# Altium PCB Expander.PcbDoc
Units mil, origin at the board's own origin, x right, y up, seen from the top; angles counter-clockwise.
Board outline 4050.03 x 1530.03 mil, 2 copper layers (Top Layer, Bottom Layer), stack 61.756 mil thick; 10 components, 42 nets, 147 pads, 15 vias.
Unrouted connection lines stored in the file: 1.
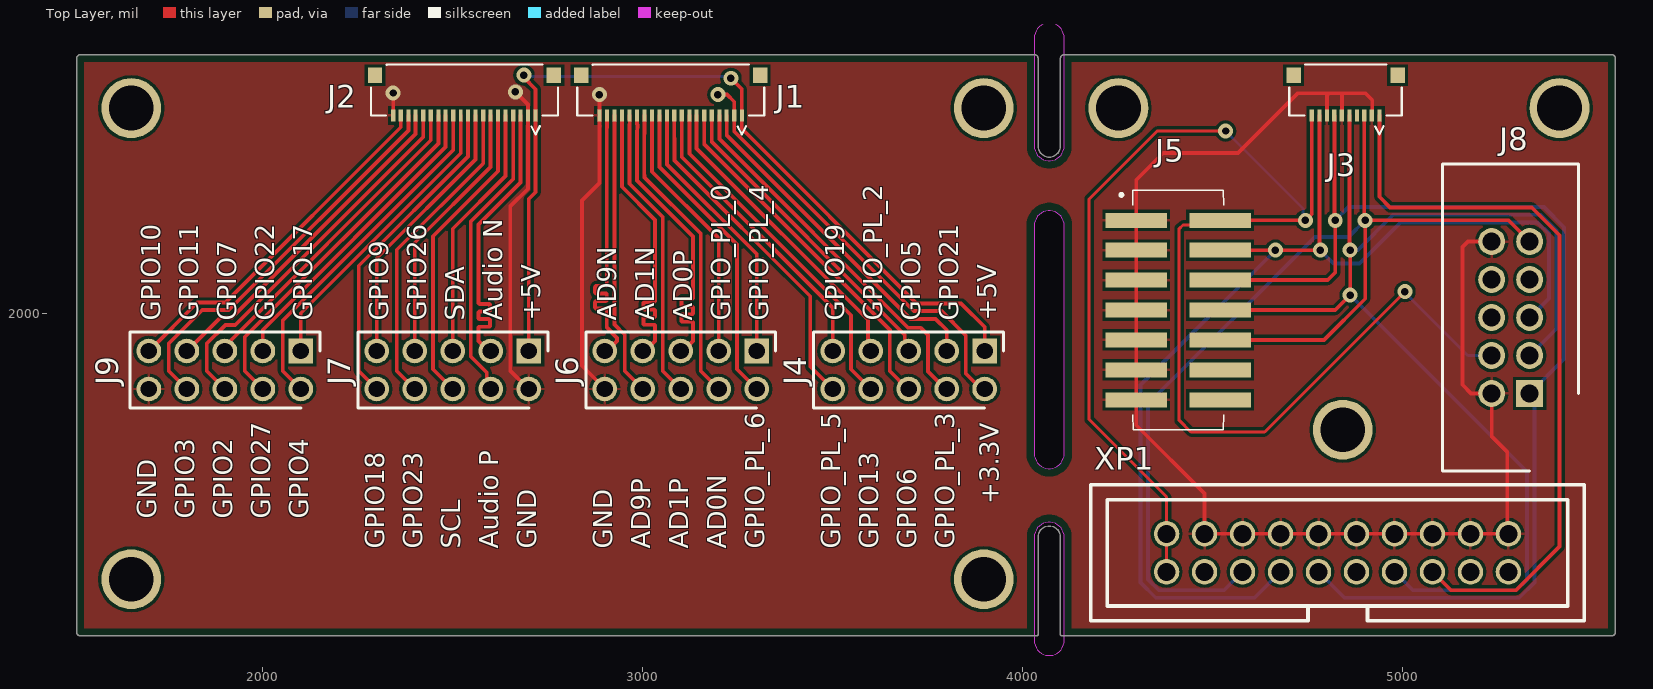
[diagram p0: Top Layer view]
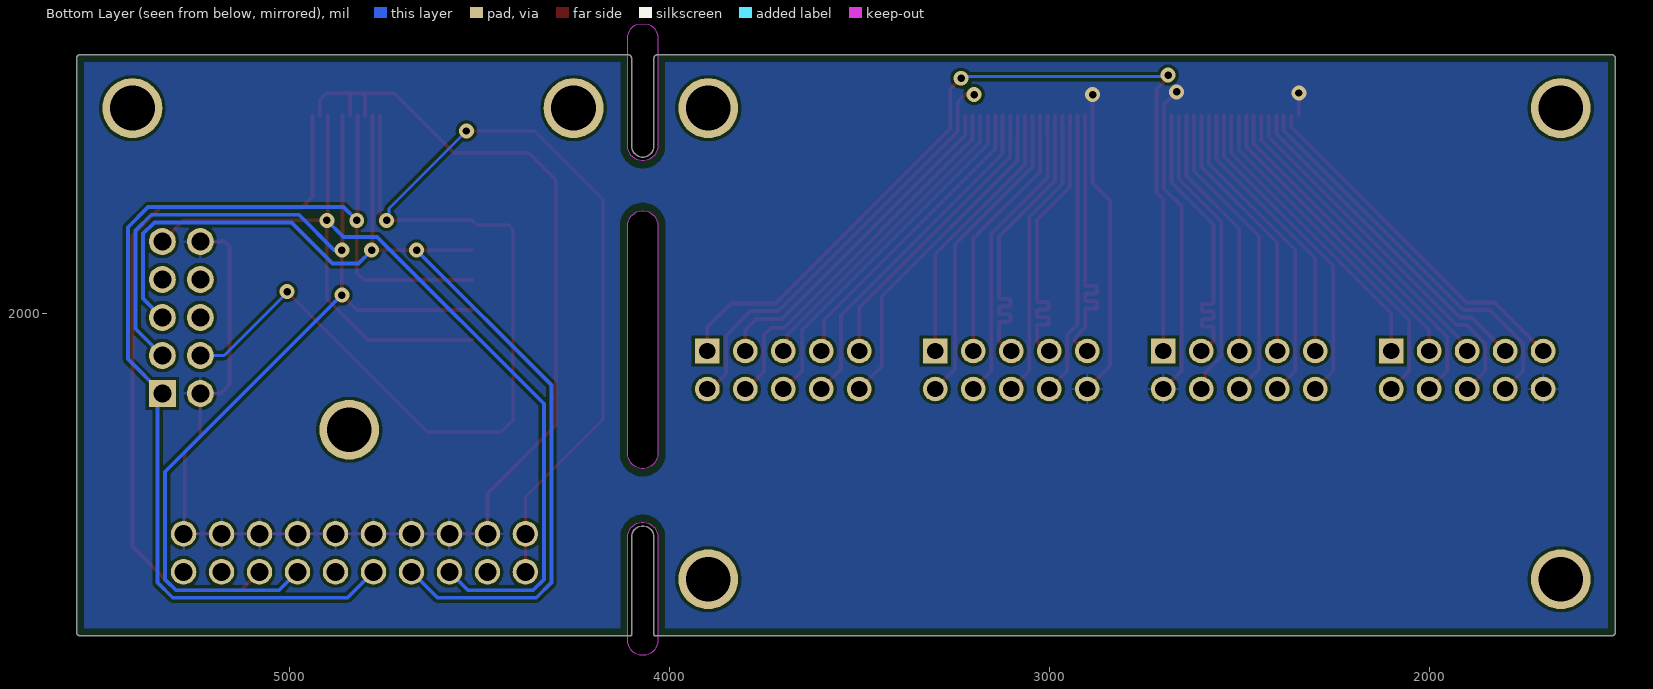
[diagram p1: Bottom Layer view, seen from below]

## Layer stack, top to bottom
Top Solder: solder mask 1, SM-001, Dk 4
Top Layer: signal copper 1.378
Dielectric 1: core 59, Core-043, Dk 4.3
Bottom Layer: signal copper 1.378
Bottom Solder: solder mask 1, SM-001, Dk 4

## Board outline
1520,1149.98 1540,1149.98 4036.07,1149.98 ccw(c4036.07,1155) 4041.08,1155 ccw(c4036.07,1155) 4040.63,1157.08 4040.63,1413.87 4042.63,1421.34 4046.5,1428.03 4051.97,1433.5 4058.66,1437.37 4066.13,1439.37 4073.87,1439.37 4081.34,1437.37 4088.03,1433.5 4093.5,1428.03 4097.37,1421.34 4099.37,1413.87 4099.37,1157.08 ccw(c4103.93,1155) 4103.93,1149.98 4104.38,1149.98 5550,1149.98 ccw(c5550,1160) 5560.02,1160 5560.02,2670 ccw(c5550,2670) 5550,2680.02 4109.39,2680.02 ccw(c4109.39,2670) 4099.37,2670 4099.37,2436.13 4097.37,2428.66 4093.5,2421.97 4088.03,2416.5 4081.34,2412.63 4073.87,2410.63 4066.13,2410.63 4058.66,2412.63 4051.97,2416.5 4046.5,2421.97 4042.63,2428.66 4040.63,2436.13 4040.63,2670 ccw(c4030.61,2670) 4030.61,2680.02 1520,2680.02 ccw(c1520,2670) 1509.98,2670 1509.98,1160 ccw(c1520,1160)
cut-out: 4030.61,1138 ccw(c4070,1138) 4109.39,1138 4109.39,1410 ccw(c4070,1410) 4030.61,1410
cut-out: 4030.61,2440 ccw(c4070,2440) 4109.39,2440 4109.39,2724 ccw(c4070,2724) 4030.61,2724
cut-out: 4030.61,1630 ccw(c4070,1630) 4109.39,1630 4109.39,2230 ccw(c4070,2230) 4030.61,2230

## Design rules (kind name [scope] priority, off if disabled: settings)
BoardOutlineClearance [All] p1: gap=20 ignorepadtopadclearanceinfootprint=FALSE
Clearance Clearance_not_via [not IsVia vs not IsVia] p1: gap=7.95 ignorepadtopadclearanceinfootprint=FALSE
Clearance Clearance_via [IsVia] p2: gap=7.95 ignorepadtopadclearanceinfootprint=FALSE
Clearance Clearance_same_net [All] p3: gap=7.95 ignorepadtopadclearanceinfootprint=TRUE
Clearance Clearance_pad_pad [IsPad vs IsPad] p4: gap=7.95 ignorepadtopadclearanceinfootprint=FALSE
ComponentClearance [All] p1: gap=3.94 collisioncheckmode=3 verticalgap=10 showdistances=FALSE
DiffPairsRouting [All] p1: maxlimit=10 minlimit=4 mostfreqgap=8 toplayer_minwidth=4 toplayer_maxwidth=100 toplayer_prefwidth=6 bottomlayer_minwidth=4 bottomlayer_maxwidth=100 bottomlayer_prefwidth=6 maxuncoupledlength=500
HoleSize [All] p1: absolutevalues=TRUE maxlimit=200 minlimit=11.81 maxpercent=80.000 minpercent=20.000
Length [All] p1: maxlimit=27559.06 minlimit=0 usedelayunits=FALSE
PlaneClearance [All] p1: clearance=7.87
PlaneConnect [All] p1: planeconnectstyle=Relief reliefexpansion=7.87 reliefentries=4 reliefconductorwidth=7.87 reliefairgap=7.87
PolygonConnect PolygonConnect_vias [All vs IsVia] p1: connectstyle=Direct reliefconductorwidth=7.87 reliefentries=4 polygonreliefangle="90 Angle" airgapwidth=7.87
PolygonConnect [All] p2: connectstyle=Relief reliefconductorwidth=7.87 reliefentries=4 polygonreliefangle="90 Angle" airgapwidth=7.87
RoomDefinition Zynq [InComponentClass('Zynq')] p1: confinementstyle=ConfineIn formatcopy=TRUE lockcomponents=FALSE outline 0,0 2000,0 2000,1000 0,1000
RoomDefinition "Wireless charger" [InComponentClass('Wireless charger')] p2: confinementstyle=ConfineIn formatcopy=TRUE lockcomponents=FALSE outline 0,0 2000,0 2000,1000 0,1000
RoomDefinition WiFI [InComponentClass('WiFI')] p3: confinementstyle=ConfineIn formatcopy=TRUE lockcomponents=FALSE outline 0,0 2000,0 2000,1000 0,1000
RoomDefinition USB [InComponentClass('USB')] p4: confinementstyle=ConfineIn formatcopy=TRUE lockcomponents=FALSE outline 0,0 2000,0 2000,1000 0,1000
RoomDefinition "QSPI flash" [InComponentClass('QSPI flash')] p5: confinementstyle=ConfineIn formatcopy=TRUE lockcomponents=FALSE outline 0,0 2000,0 2000,1000 0,1000
RoomDefinition Power [InComponentClass('Power')] p6: confinementstyle=ConfineIn formatcopy=TRUE lockcomponents=FALSE outline 0,0 2000,0 2000,1000 0,1000
RoomDefinition eMMC [InComponentClass('eMMC')] p7: confinementstyle=ConfineIn formatcopy=TRUE lockcomponents=FALSE outline 0,0 2000,0 2000,1000 0,1000
RoomDefinition DDR3 [InComponentClass('DDR3')] p8: confinementstyle=ConfineIn formatcopy=TRUE lockcomponents=FALSE outline 0,0 2000,0 2000,1000 0,1000
RoomDefinition Connectors [InComponentClass('Connectors')] p9: confinementstyle=ConfineIn formatcopy=TRUE lockcomponents=FALSE outline 0,0 2000,0 2000,1000 0,1000
RoomDefinition Charge [InComponentClass('Charge')] p10: confinementstyle=ConfineIn formatcopy=TRUE lockcomponents=FALSE outline 0,0 2000,0 2000,1000 0,1000
RoomDefinition Audio [InComponentClass('Audio')] p11: confinementstyle=ConfineIn formatcopy=TRUE lockcomponents=FALSE outline 0,0 2000,0 2000,1000 0,1000
RoutingVias [All] p1: holewidth=7.87 width=15.75 viastyle="Through Hole" minholewidth=7.87 minwidth=15.75 maxholewidth=248.03 maxwidth=393.7
SilkToSolderMaskClearance [IsPad] p1: minsilkscreentomaskgap=2 clearancetoexposedcopper=TRUE
SolderMaskExpansion [All] p1: expansion=2
Width [All] p1: maxlimit=78.74 minlimit=7.87 preferedwidth=7.87
Width Width_power [InNetClass('Power')] p2: maxlimit=78.74 minlimit=7.87 preferedwidth=7.87
24 further rules are at their usual default settings.

## Classes and differential pairs
differential pair "External audio": +"External audio_P" -"External audio_N"
differential pair AD9: +AD9_P -AD9_N
differential pair AD1: +AD1_P -AD1_N
differential pair AD0: +AD0_P -AD0_N

## Components (designator, comment, footprint, x,y, rotation, side; value= is the part's Value field where it differs from the comment)
J1 "FCI_10051922-2010ELF" *FCI_10051922-2010ELF#1 3171.85,2453 r0 top
J2 "FCI_10051922-2010ELF" *FCI_10051922-2010ELF#2 2629,2453 r0 top
J3 "FCI_10051922-1010ELF" *FCI_10051922-1010ELF 4850,2453 r0 top
J4 "90131-0765" HDRV10W90P254_2X5_1260X500X560P 3900,1900 r180 top
J5 "98424-G52-14ALF" 98424G5214ALF 4409.45,2007.87 r270 top
J6 "90131-0765" HDRV10W90P254_2X5_1260X500X560P 3300,1900 r180 top
J7 "90131-0765" HDRV10W90P254_2X5_1260X500X560P 2700,1900 r180 top
J8 "0702461004" SHDR10W99P254_2X5_2032X889X947P 5334.65,1788.19 r90 top
J9 "90131-0765" HDRV10W90P254_2X5_1260X500X560P 2100,1900 r180 top
XP1 "BH-20" BH-20 4828.74,1368.9 r0 top

## Footprints (in the part's own frame and the unit in brackets; to place one, negate y for a bottom-side part, rotate by r counter-clockwise, add the part's x,y. Pads: shape width x height; smd on the part's side, far side on the other; paste and mask are expansions set on the pad)
98424G5214ALF [mm]
  rect 1x4.1 smd mask+0.102: 1(-6,-2.8) 2(-6,2.8) 3(-4,-2.8) 4(-4,2.8) 5(-2,-2.8) 6(-2,2.8) 7(0,-2.8) 8(0,2.8) 9(2,-2.8) 10(2,2.8) 11(4,-2.8) 12(4,2.8) 13(6,-2.8) 14(6,2.8)
  silkscreen extent -8,-3.9 8,3.05, body extent -8,-4.75 8,4.75, height 7.1
*FCI_10051922-1010ELF [mil]
  rect 11x32 smd mask+4: 1(89,67) 2(69,67) 3(49,67) 4(30,67) 5(10,67) 6(-10,67) 7(-30,67) 8(-49,67) 9(-69,67) 10(-89,67)
  rect 38x40 smd mask+4: 11(-137,173) 12(137,173)
  silkscreen extent -148,17 148,201, body extent -148,59 148,207, height 50
*FCI_10051922-2010ELF#1 [mil]
  rect 38x40 smd mask+4: 0(-333.85,173) 0(137,173)
  rect 11x32 smd mask+4: 1(89,67) 2(69,67) 3(49,67) 4(30,67) 5(10,67) 6(-10,67) 7(-30,67) 8(-49,67) 9(-69,67) 12(-127.85,67) 13(-147.85,67) 14(-166.85,67) 15(-186.85,67) 16(-206.85,67) 17(-226.85,67) 18(-245.85,67) 19(-265.85,67) 20(-285.85,67)
  rect 10.9x32 smd mask+4: 10(-89,67)
  rect 10x32 smd mask+4: 11(-107.85,67)
  silkscreen extent -344,17 148,201, body extent -344,57 148,205, height 50
*FCI_10051922-2010ELF#2 [mil]
  rect 38x40 smd mask+4: 0(-333.85,173) 0(137,173)
  rect 11x32 smd mask+4: 1(89,67) 2(69,67) 3(49,67) 4(30,67) 5(10,67) 6(-10,67) 7(-30,67) 8(-49,67) 9(-69,67) 10(-89,67) 12(-127.85,67) 13(-147.85,67) 14(-166.85,67) 15(-186.85,67) 16(-206.85,67) 17(-226.85,67) 18(-245.85,67) 19(-265.85,67) 20(-285.85,67)
  rect 10x32 smd mask+4: 11(-107.85,67)
  silkscreen extent -344,17 148,201, body extent -344,57 148,205, height 50
BH-20 [mm]
  round 1.7 hole 1.2 mask+0.102: 1(-11.43,-1.27) 2(-11.43,1.27) 3(-8.89,-1.27) 4(-8.89,1.27) 5(-6.35,-1.27) 6(-6.35,1.27) 7(-3.81,-1.27) 8(-3.81,1.27) 9(-1.27,-1.27) 10(-1.27,1.27) 11(1.27,-1.27) 12(1.27,1.27) 13(3.81,-1.27) 14(3.81,1.27) 15(6.35,-1.27) 16(6.35,1.27) 17(8.89,-1.27) 18(8.89,1.27) 19(11.43,-1.27) 20(11.43,1.27)
  silkscreen extent -16.5,-4.55 16.5,4.55, body extent -16.52,-4.55 16.53,4.55, height 9
HDRV10W90P254_2X5_1260X500X560P [mm]
  rect 1.65x1.65 hole 1.1 mask+0.102: 1(0,0)
  round 1.65 hole 1.1 mask+0.102: 2(0,2.54) 3(2.54,0) 4(2.54,2.54) 5(5.08,0) 6(5.08,2.54) 7(7.62,0) 8(7.62,2.54) 9(10.16,0) 10(10.16,2.54)
  silkscreen extent -1.27,-1.27 11.43,3.81, body extent -1.22,-1.27 11.38,3.74, height 9.49
SHDR10W99P254_2X5_2032X889X947P [mm]
  rect 1.8x1.8 hole 1.2 mask+0.102: 1(0,0)
  round 1.8 hole 1.2 mask+0.102: 2(0,2.54) 3(2.54,0) 4(2.54,2.54) 5(5.08,0) 6(5.08,2.54) 7(7.62,0) 8(7.62,2.54) 9(10.16,0) 10(10.16,2.54)
  silkscreen extent -5.18,-3.28 15.34,5.82

## Part data
J1 J2: "0.50mm FFC/FPC Connectors 20CKT RA SMT ZIF CON BOTTOM CONTACT", Contact Resistance=30mR, Current Rating=500mA, Flammability Rating="UL94 V-0", Housing Color=Natural, Insulation Resistance=100MR, Manufacturer 1="Amphenol FCI", Manufacturer Part Number 1=10051922-2010ELF, Max Operating Temperature=85°C, Max Voltage Rating (AC)=50V, Min Operating Temperature=-55°C, Package Quantity=4500, Supplier Part Number 1=609-1240-1-ND, Actuator Material=Nylon,Glass,Polyamide, ComponentLink1Description=https://datasheet.ciiva.com/673/10051922-673159.pdf?src-supplier=Digi-Key, ComponentLink1URL=https://datasheet.ciiva.com/673/10051922-673159.pdf?src-supplier=Digi-Key, ComponentLink2Description=https://datasheet.ciiva.com/1437/10051922-1437497.pdf?src-supplier=Element14, ComponentLink2URL=https://datasheet.ciiva.com/1437/10051922-1437497.pdf?src-supplier=Element14, ComponentLink3Description=https://datasheet.ciiva.com/16658/10051922-16658794.pdf?src-supplier=Avnet+Europe, ComponentLink3URL=https://datasheet.ciiva.com/16658/10051922-16658794.pdf?src-supplier=Avnet+Europe, ComponentLink4Description=https://datasheet.ciiva.com/673/10051922-673158.pdf?src-supplier=Digi-Key, ComponentLink4URL=https://datasheet.ciiva.com/673/10051922-673158.pdf?src-supplier=Digi-Key, Contact Location=Bottom, Contact Material="Copper Alloy,Bronze,Copper", Contact Plating=Gold, Depth=3.4mm, Housing Material=Polymer, Lead Free="Lead Free", Length=12.5mm, Manufacturer 2="Amphenol FCI", Manufacturer Part Number 2=10051922-2010ELF, Max Voltage Rating (DC)=50V, Mount="Surface Mount", Number of Contacts=20, Number of Positions=20, Number of Rows=1, Orientation="Right Angle", Packaging="Tape and Reel", Pitch=0.5mm, Pricing 1="1=0,73000, 10=0,64500, 25=0,60760, 50=0,58220, 100=0,55680, 250=0,50624, 500=0,45560, 1000=0,40498 (USD)", Pricing 2="1=0,73000, 10=0,58300, 50=0,58300, 100=0,50700, 500=0,45600, 1000=0,40500, 2500=0,34600, 9000=0,30700, 10000=0,30700, 22500=0,30000 (USD)", Radiation Hardening=No, REACH SVHC="No SVHC", RoHS=Yes, Stock 1=913, Stock 2=2006, Supplier 1=Digi-Key, Supplier 2=Mouser, Supplier Part Number 2=649-10051922-2010ELF, Termination=Solder, Voltage Rating=50V, Width=3.4mm
J3: "0.50mm FFC/FPC Connectors 10CKT RA SMT ZIF CON BOTTOM CONTACT", Contact Resistance=30mR, Current Rating=500mA, Flammability Rating="UL94 V-0", Housing Color=Natural, Insulation Resistance=100MR, Manufacturer 1="Amphenol FCI", Manufacturer Part Number 1=10051922-1010ELF, Max Operating Temperature=85°C, Max Voltage Rating (AC)=50V, Min Operating Temperature=-55°C, Package Quantity=4500, Supplier Part Number 1=609-1234-1-ND, Actuator Material=Nylon,Glass,Polyamide, ComponentLink1Description=https://datasheet.ciiva.com/1437/10051922-1437495.pdf?src-supplier=Element14, ComponentLink1URL=https://datasheet.ciiva.com/1437/10051922-1437495.pdf?src-supplier=Element14, ComponentLink2Description=https://datasheet.ciiva.com/15176/getdatasheetpartid-131484-15176375.pdf?src-supplier=Verical, ComponentLink2URL=https://datasheet.ciiva.com/15176/getdatasheetpartid-131484-15176375.pdf?src-supplier=Verical, ComponentLink3Description=https://datasheet.ciiva.com/670/10051922-670057.pdf?src-supplier=Digi-Key, ComponentLink3URL=https://datasheet.ciiva.com/670/10051922-670057.pdf?src-supplier=Digi-Key, ComponentLink4Description=https://datasheet.ciiva.com/670/10051922-670058.pdf?src-supplier=Digi-Key, ComponentLink4URL=https://datasheet.ciiva.com/670/10051922-670058.pdf?src-supplier=Digi-Key, ComponentLink5Description=https://datasheet.ciiva.com/5136/fcicmd-catcustomerdrawingproductname-10051922-1010elf-5136554.pdf?src-supplier=Mouser, ComponentLink5URL=https://datasheet.ciiva.com/5136/fcicmd-catcustomerdrawingproductname-10051922-1010elf-5136554.pdf?src-supplier=Mouser, ComponentLink6Description=https://datasheet.ciiva.com/670/10051922-670059.pdf?src-supplier=Digi-Key, ComponentLink6URL=https://datasheet.ciiva.com/670/10051922-670059.pdf?src-supplier=Digi-Key, ComponentLink7Description=https://datasheet.ciiva.com/10367/10051922-10367679.pdf?src-supplier=Avnet, ComponentLink7URL=https://datasheet.ciiva.com/10367/10051922-10367679.pdf?src-supplier=Avnet, Contact Location=Bottom, Contact Material="Copper Alloy,Bronze", Contact Plating=Gold, Depth=3.4mm, Gender=Female, Housing Material=Polymer, Lead Free="Lead Free", Length=7.5mm, Manufacturer 2="Amphenol FCI", Manufacturer Part Number 2=10051922-1010ELF, Max Voltage Rating (DC)=50V, Mount="Surface Mount", Number of Contacts=10, Number of Positions=10, Number of Rows=1, Orientation="Right Angle", Packaging="Tape and Reel", Pitch=0.5mm, Pricing 1="1=0,85000, 10=0,74400, 25=0,70080, 50=0,67140, 100=0,64230, 250=0,58388, 500=0,52550, 1000=0,46710 (USD)", Pricing 2="1=0,85000, 10=0,67200, 50=0,67200, 100=0,64300, 250=0,58400, 500=0,52600, 1000=0,46800, 2500=0,40300, 4500=0,38500, 9000=0,34600, 10000=0,34600 (USD)", Radiation Hardening=No, REACH SVHC="No SVHC", RoHS=Yes, Stock 1=3851, Stock 2=5616, Supplier 1=Digi-Key, Supplier 2=Mouser, Supplier Part Number 2=649-10051922-1010ELF, Termination=Solder, Voltage Rating=50V, Width=3.4mm
J4 J6 J7 J9: "Connector", Manufacturer_Name=Molex, Mouser Part Number=538-90131-0765, RS Part Number=3606471P, Allied_Number=70372850, Allied Price/Stock=https://www.alliedelec.com/molex-incorporated-90131-0765/70372850/, Datasheet Link=http://www.molex.com/molex/products/datasheet.jsp?part=active/0901310765_PCB_HEADERS.xml, Height=5.6mm, Manufacturer_Part_Number=90131-0765, Mouser Price/Stock=https://www.mouser.com/Search/Refine.aspx?Keyword=538-90131-0765, RS Price/Stock=http://uk.rs-online.com/web/p/products/3606471P
J5: "Connector", Manufacturer_Name=Amphenol, Mouser Part Number=649-98424-G52-14ALF, RS Part Number=1822960, Allied_Number=70236917, Allied Price/Stock=https://www.alliedelec.com/amphenolicc-98424-g52-14alf/70236917/, Datasheet Link=https://cdn.amphenol-icc.com/media/wysiwyg/files/drawing/98424.pdf, Height=7mm, Manufacturer_Part_Number=98424-G52-14ALF, Mouser Price/Stock=https://www.mouser.com/Search/Refine.aspx?Keyword=649-98424-G52-14ALF, RS Price/Stock=http://uk.rs-online.com/web/p/products/1822960
J8: "Connector", Manufacturer_Name=Molex, Mouser Part Number=N/A, Datasheet Link=http://www.molex.com/pdm_docs/sd/702461004_sd.pdf, Height=9.47mm, Manufacturer_Part_Number=0702461004, Mouser Price/Stock=https://www.mouser.com/Search/Refine.aspx?Keyword=N%2FA
XP1: "JTAG", ??????=??????

## Free pads (board coordinates)
  round 157.48 hole 118.11 mask+4: 4(1653.54,1299.21) 4(1653.54,2539.37) 4(3897.64,1299.21) 4(3897.64,2539.37) 4(4251.97,2539.37) 4(4842.52,1692.91) 4(5413.39,2539.37)

## Via types
v1: diameter 39.37, hole 19.68, Top Layer to Bottom Layer, tented both sides, 15 vias

## Nets (pads, with @x,y where several pads share a name; then routed paths per layer and width w, separated by ;. In a path a pad name is that pad's centre, name@x,y a point inside that pad or via, vN(x,y) a via of type N, cw(c..) or ccw(c..) an arc to the next point about the centre after c; other vN are vias at no path point)
AD0_N: J1.14 J6.4 | length 801.6
  Top Layer w10: J1.14 3005,2509.5 3004.5,2509 3004.5,2471.85 3004,2471.35 3004,2363.72 3005,2362.72 3005,2357.05 3152.52,2209.53 3152.52,1847.48 J6.4
AD0_P: J1.15 J6.5 | length 808.4
  Top Layer w10: J1.15 2985,2496.79 2986,2495.79 2986,2488.5 2985.5,2488 2985.5,2479.72 2985,2479.22 2985,2348.77 3132.52,2201.25 3132.52,2113 3132.52,2041 cw(c3128.52,2041) 3128.52,2037 3105.74,2037 ccw(c3105.74,2033) 3101.74,2033 3101.74,2021 ccw(c3105.74,2021) 3105.74,2017 3128.52,2017 cw(c3128.52,2013) 3132.52,2013 3132.52,2001 cw(c3128.52,2001) 3128.52,1997 3105.74,1997 ccw(c3105.74,1993) 3101.74,1993 3101.74,1981 ccw(c3105.74,1981) 3105.74,1977 3128.52,1977 cw(c3128.52,1973) 3132.52,1973 3132.52,1967 3132.52,1926.34 3106.18,1900 J6.5
AD1_N: J1.17 J6.7 | length 782.4
  Top Layer w10: J1.17 2945,2332.2 3032.52,2244.68 3032.52,2118 3032.52,2033 cw(c3028.52,2033) 3028.52,2029 3005.81,2029 ccw(c3005.81,2025) 3001.81,2025 3001.81,2013 ccw(c3005.81,2013) 3005.81,2009 3028.52,2009 cw(c3028.52,2005) 3032.52,2005 3032.52,1993 cw(c3028.52,1993) 3028.52,1989 3005.81,1989 ccw(c3005.81,1985) 3001.81,1985 3001.81,1973 ccw(c3005.81,1973) 3005.81,1969 3028.52,1969 cw(c3028.52,1965) 3032.52,1965 3032.52,1959 3032.52,1926.34 3006.18,1900 J6.7
AD1_P: J1.16 J6.6 | length 776.7
  Top Layer w10: J1.16 2965,2510 2966,2509 2966,2497.79 2965,2496.79 2965,2340.48 3052.52,2252.96 3052.52,1847.48 J6.6
AD9_N: J1.19 J6.9 | length 758
  Top Layer w10: J6.9 2906.18,1900 2932.52,1926.34 2932.52,1934.63 2905.5,1961.65 2905.5,1971.65 2905.5,1991.65 2905.5,2007.65 ccw(c2901.5,2007.65) 2901.5,2011.65 2878.68,2011.65 cw(c2878.68,2015.65) 2874.68,2015.65 2874.68,2027.65 cw(c2878.68,2027.65) 2878.68,2031.65 2901.5,2031.65 ccw(c2901.5,2035.65) 2905.5,2035.65 2905.5,2047.65 ccw(c2901.5,2047.65) 2901.5,2051.65 2878.68,2051.65 cw(c2878.68,2055.65) 2874.68,2055.65 2874.68,2067.65 cw(c2878.68,2067.65) 2878.68,2071.65 2901.5,2071.65 ccw(c2901.5,2075.65) 2905.5,2075.65 2905.5,2087 2905.5,2488 2906,2488.5 J1.19
AD9_P: J1.18 J6.8 | length 751.1
  Top Layer w10: J1.18 2926,2480.22 2925.5,2479.72 2925.5,1969.93 2952.52,1942.91 2952.52,1847.48 J6.8
"External audio_N": J2.3 J7.3 | length 792.1
  Top Layer w10: J7.3 2593.82,1900 2567.48,1926.34 2567.48,1934 2567.48,1944 2567.48,1960 cw(c2571.48,1960) 2571.48,1964 2594.11,1964 ccw(c2594.11,1968) 2598.11,1968 2598.11,1980 ccw(c2594.11,1980) 2594.11,1984 2571.48,1984 cw(c2571.48,1988) 2567.48,1988 2567.48,2000 cw(c2571.48,2000) 2571.48,2004 2594.11,2004 ccw(c2594.11,2008) 2598.11,2008 2598.11,2020 ccw(c2594.11,2020) 2594.11,2024 2571.48,2024 cw(c2571.48,2028) 2567.48,2028 2567.48,2101 2567.48,2232.91 2678,2343.43 2678,2495.79 2678.5,2496.29 2678.5,2509 2678,2509.5 J2.3
"External audio_P": J2.4 J7.4 | length 787.9
  Top Layer w10: J7.4 2589.48,1810.52 2589.48,1843.37 2547.48,1885.37 2547.48,2241.2 2659,2352.72 J2.4
"External SCL": J2.6 J7.6 | length 812.4
  Top Layer w10: J7.6 2448,1852 2448,2202 2619,2373 J2.6
"External SDA": J2.5 J7.5 | length 677.6
  Top Layer w10: J7.5 2500,2222 2639,2361 J2.5
GND: J1.20 J2.2 J2.20 J3.2 J3.6 J3.8 J5.1 J5.3 J5.5 J5.7 J5.9 J5.11 J5.13 J6.10 J7.2 J8.2 J8.10 J9.10 XP1.4 XP1.6 XP1.8 XP1.10 XP1.12 XP1.14 XP1.16 XP1.18 XP1.20 | length 5352.8
  Top Layer w10: J2.20 v1(2343.15,2579.15) v1@2344,2580 ; v1(2665,2582) 2698,2549 J2.2 2698,2327 2651,2280 2651,1849 J7.2 ; v1@2886,2585 v1(2886,2575) J1.20 2886,2342 2840,2296 2840,1861 2900,1801 J6.10 ; J5.13@4311.02,1783.46 J5.13 ; J3.8 4801,2572.88 4806.86,2578.74 ; J3.6 4840,2528.28 4840.82,2529.1 4840.82,2574.58 4836.66,2578.74 ; J3.2 4920,2521 4920,2560.31 4901.57,2578.74 4836.66,2578.74 ; J8.10 5172.19,2188.19 5157.48,2173.48 5157.48,1811.02 5180.31,1788.19 J8.2 5234.65,1674.8 5275.59,1633.86 5275.59,1422.05 XP1.20 XP1.18 XP1.16 XP1.14 XP1.12 XP1.10 XP1.8 XP1.6 XP1.4 4478.74,1525.2 4299.21,1704.72 J5.13 ; J5.13 J5.11 J5.9 J5.7 J5.5 J5.3 J5.1 4299.21,2350.39 4370.08,2421.26 4566.93,2421.26 4724.41,2578.74 4806.86,2578.74 ; 4806.86,2578.74 4836.66,2578.74
GPIO2: J2.16 J9.6 | length 990.9
  Top Layer w10: J9.6 1852.52,1847.48 1852.52,1919.67 1901.36,1968.5 1927.51,1968.5 2422.15,2463.15 J2.16
GPIO3: J2.18 J9.8 | length 1041.6
  Top Layer w10: J9.8 1752.52,1847.48 1752.52,1919.67 1840.73,2007.87 1910.31,2007.87 2383.15,2480.72 J2.18
GPIO4: J2.12 J9.2 | length 925.5
  Top Layer w10: J9.2 2052.52,1847.48 2052.52,1980.38 2501.15,2429.01 J2.12
GPIO5: J1.5 J4.5 | length 834.6
  Top Layer w10: 3181.85,2450.15 J1.5 ; 3182.06,2450.15 3689.69,1942.52 ; 3689.48,1942.52 3689.48,1910.52 J4.5
GPIO6: J1.6 J4.6 | length 944.7
  Top Layer w10: 3161.85,2443.15 J1.6 ; 3162.36,2443.15 3650.51,1955 ; 3650,1955 3650,1847 3697,1800 J4.6
GPIO7: J2.15 J9.5 | length 844.6
  Top Layer w10: J9.5 1900,1912.71 2442.15,2454.86 J2.15
GPIO9: J2.9 J7.9 | length 727.7
  Top Layer w10: J7.9 2300,2144 2560,2404 J2.9
GPIO10: J2.19 J9.9 | length 938.1
  Top Layer w10: J9.9 1827.56,2027.56 1901.71,2027.56 2363.15,2489 J2.19
GPIO11: J2.17 J9.7 | length 887.4
  Top Layer w10: J9.7 1888.19,1988.19 1918.91,1988.19 2402.15,2471.43 J2.17
GPIO13: J1.8 J4.8 | length 917.6
  Top Layer w10: 3122.85,2419.15 J1.8 ; 3122.97,2419.15 3548.12,1994 ; 3548,1994 3548,1852 J4.8
GPIO17: J2.11 J9.1 | length 794.4
  Top Layer w10: J9.1 2100,1999.58 2521.15,2420.73 J2.11
GPIO18: J2.10 J7.10 | length 858.7
  Top Layer w10: J7.10 2252.52,1847.48 2252.52,2124.52 2540,2412 J2.10
GPIO19: J1.9 J4.9 | length 784.5
  Top Layer w10: 3102.85,2410.15 J1.9 ; 3103.27,2410.15 3500.42,2013 ; J4.9 3500,2013
GPIO21: J1.3 J4.3 | length 898.5
  Top Layer w10: 3220.85,2467.15 J1.3 ; 3221.45,2467.15 3704.61,1984 3771,1984 3800,1955 J4.3
GPIO22: J2.13 J9.3 | length 819.3
  Top Layer w10: J9.3 2000,1956.14 2481.15,2437.29 J2.13
GPIO23: J2.8 J7.8 | length 833.9
  Top Layer w10: J7.8 2352.52,1847.48 2352.52,2166.52 2580,2394 J2.8
GPIO25: J2.7 J7.7 | length 702.4
  Top Layer w10: J7.7 2400,2185 2599,2384 J2.7
GPIO27: J2.14 J9.4 | length 950.8
  Top Layer w10: J9.4 1952.52,1847.48 1952.52,1936.95 2462.15,2446.58 J2.14
GPIO_PL_0: J1.13 J6.3 | length 692.9
  Top Layer w10: 3024,2372 J1.13 ; 3024.49,2372 3200.49,2196 ; J6.3 3200,2196
GPIO_PL_2: J1.7 J4.7 | length 825.8
  Top Layer w10: 3141.85,2432.15 J1.7 ; 3142.67,2432.15 3593.82,1981 ; 3593,1981 3593,1899 3600,1892 J4.7
GPIO_PL_3: J1.4 J4.4 | length 988.9
  Top Layer w10: J1.4 3201.85,2458.15 3699,1961 3732,1961 3751,1942 3751,1909 3751,1846 3797,1800 J4.4
GPIO_PL_4: J1.11 J6.1 | length 717.8
  Top Layer w10: 3063.88,2391 3299.88,2155 ; 3064,2391 J1.11 ; J6.1 3300,2155
GPIO_PL_5: J1.10 J4.10 | length 1008.3
  Top Layer w10: 3083.58,2404.15 J1.10 3083.59,2401.41 3441,2044 3441,1859 J4.10
GPIO_PL_6: J1.12 J6.2 | length 826
  Top Layer w10: 3044,2384 J1.12 ; 3044.18,2384 3248.18,2180 ; 3248,2180 3248,1852 J6.2
NRST: J3.1 XP1.15 | length 1952.2
  Top Layer w10: J3.1 4939,2306 4967,2278 5340.11,2278 5413.39,2204.72 5413.39,1385 5298.81,1270.43 5127.2,1270.43 XP1.15
"TCK Zynq": J3.7 J5.6 J8.1 XP1.9 | length 2957.4
  Top Layer w10: J5.6 4803.15,2086.61 4822.83,2106.3 v1(4822.83,2244.09) v1@4821,2245.93 ; v1@4820,2246.93 v1@4821,2245.93 ; J3.7 4821,2519 v1@4821,2245.93
  Bottom Layer w10: XP1.9 4847.2,1250.43 5307.1,1250.43 5347.2,1290.54 5347.2,1775.63 J8.1 5425.08,1878.62 5425.08,2225.65 5371.95,2278.78 4857.52,2278.78 v1(4822.83,2244.09)
"TDI Zynq": J3.3 J5.10 J8.9 XP1.5 | length 2876.9
  Top Layer w10: J5.10 4793.15,1929.13 4901.57,2037.56 v1(4901.57,2244.09) 5278.74,2244.09 J8.9 ; v1@4899,2246.67 J3.3
  Bottom Layer w10: XP1.5 4530.28,1270.43 4358.67,1270.43 4330.28,1298.82 4330.28,1761.22 4769.1,2200.04 4857.52,2200.04 v1(4901.57,2244.09)
"TDO Zynq": J3.5 J5.8 J8.3 XP1.13 | length 3110.9
  Top Layer w10: J5.8 4822.83,2007.87 v1(4862.2,2047.24) v1(4862.2,2165.35) 4860,2167.56 J3.5
  Bottom Layer w10: v1(4862.2,2047.24) 5327.2,1582.24 5327.2,1298.82 5298.81,1270.43 5027.2,1270.43 XP1.13 ; v1@4862.2,2165 4881.54,2165 4975.16,2258.62 5363.82,2258.62 5405.08,2217.36 5405.08,1958.62 J8.3
"TMS Zynq": J3.9 J5.4 J8.5 XP1.7 | length 2969.5
  Top Layer w10: J5.4 v1(4783.46,2165.35) 4781,2167.82 J3.9
  Bottom Layer w10: v1(4665.35,2165.35) 4310.28,1810.28 4310.28,1290.54 4350.38,1250.43 4610.28,1250.43 XP1.7 ; v1(4783.46,2165.35) 4818.15,2130.67 4886.57,2130.67 4994.53,2238.62 5355.54,2238.62 5385.08,2209.08 5385.08,2038.62 J8.5
"VCC 3.3V": J1.2 J3.10 J4.2 J5.2 J8.4 XP1.1 XP1.2 | length 5134.6
  Top Layer w7.87: XP1.1 XP1.2 4378.74,1516.26 4175,1720 4175,2300 4354,2479 v1@4532,2479 ; J5.2 4507.59,2232 4422,2232 4412,2222 4412,1717.61 4442.61,1687 4637,1687 v1(5006.09,2056.09)
  Top Layer w10: v1(3198,2575) 3222,2575 3240.85,2556.15 J1.2 3240.85,2477.15 ; 3241.15,2477.15 3713.3,2005 3786.14,2005 3850,1941.14 3850,1841 3891,1800 J4.2 ; J5.2 v1(4744.09,2244.09) 4761,2261 J3.10
  Bottom Layer w7.87: v1(4534.09,2479.09) 4738.07,2275.12 4738.07,2250.12 v1(4744.09,2244.09) ; v1@5004,2056 5171.81,1888.19 J8.4
"VCC 5V": J1.1 J2.1 J4.1 J7.1 | length 2357.8
  Top Layer w10: v1(2687,2626) 2687,2620 2718,2589 J2.1 2718,2318 2700,2300 J7.1 ; v1(3232,2618) 3260.85,2589.15 J1.1 3260.85,2485.15 3721,2025 3838,2025 3900,1963 J4.1
  Bottom Layer w7.87: v1(2687,2626) 2691,2622 3228,2622 v1(3232,2618)
pads on no net: J1.0 J2.0 J3.4 J3.11 J3.12 J5.12 J5.14 J8.6 J8.7 J8.8 XP1.3 XP1.11 XP1.17 XP1.19

## Polygon pours and split planes (outlines as drawn)
GND on Bottom Layer "Bottom Layer-GND" (solid, pour order 2): 5551.18,2677.17 5551.18,1161.42 1515.75,1161.42 1515.75,2677.17
GND on Top Layer "Top Layer-GND" (solid, pour order 0): 5551.18,2677.17 5551.18,1161.42 1515.75,1161.42 1515.75,2677.17

## Silkscreen, mask and mechanical layers (free items; w line width, h text height)
Top Overlay:
  text "GPIO10" at 1730,1980 h50 r90
  text "GPIO11" at 1830,1980 h50 r90
  text "GPIO7" at 1930,1980 h50 r90
  text "GPIO22" at 2030,1980 h50 r90
  text "GPIO17" at 2130,1980 h50 r90
  text "GPIO9" at 2330,1980 h50 r90
  text "GPIO26" at 2430,1980 h50 r90
  text "SDA" at 2530,1980 h50 r90
  text "Audio N" at 2630,1980 h50 r90
  text "+5V" at 2730,1980 h50 r90
  text "AD9N" at 2930,1980 h50 r90
  text "AD1N" at 3030,1980 h50 r90
  text "AD0P" at 3130,1980 h50 r90
  text "GPIO_PL_0" at 3230,1980 h50 r90
  text "GPIO_PL_4" at 3330,1980 h50 r90
  text "GPIO19" at 3530,1980 h50 r90
  text "GPIO_PL_2" at 3630,1980 h50 r90
  text "GPIO5" at 3730,1980 h50 r90
  text "GPIO21" at 3830,1980 h50 r90
  text "+5V" at 3930,1980 h50 r90
  text "+3.3V" at 3937.01,1496.06 h50 r90
  text "GND" at 1720,1458.74 h50 r90
  text "GPIO3" at 1820,1458.74 h50 r90
  text "GPIO2" at 1920,1458.74 h50 r90
  text "GPIO27" at 2020,1458.74 h50 r90
  text "GPIO4" at 2120,1458.74 h50 r90
  text "GPIO18" at 2320,1380 h50 r90
  text "GPIO23" at 2420,1380 h50 r90
  text "SCL" at 2520,1380 h50 r90
  text "Audio P" at 2620,1380 h50 r90
  text "GND" at 2720,1380 h50 r90
  text "GND" at 2920,1380 h50 r90
  text "AD9P" at 3020,1380 h50 r90
  text "AD1P" at 3120,1380 h50 r90
  text "AD0N" at 3220,1380 h50 r90
  text "GPIO_PL_6" at 3320,1380 h50 r90
  text "GPIO_PL_5" at 3520,1380 h50 r90
  text "GPIO13" at 3620,1380 h50 r90
  text "GPIO6" at 3720,1380 h50 r90
  text "GPIO_PL_3" at 3820,1380 h50 r90
Board:
  lines w10: 1504.98,1158.01 ccw(c1509.98,1158.01) 1505.36,1156.09 ; 1504.98,1158.01 ccw(c1509.98,1158.01) 1505.37,1156.08 ; 1504.98,1158.01 1504.98,1160 1504.98,2670 1504.98,2671.99 ; 1504.98,2671.99 cw(c1509.98,2671.99) 1505.37,2673.92 ; 1504.98,2671.99 cw(c1509.98,2671.99) 1505.36,2673.91 ; 1505.36,1156.09 1505.37,1156.08 ; 1505.37,1156.08 1506.88,1152.43 ; 1505.37,2673.92 1506.88,2677.57 ; 1505.36,2673.91 1505.37,2673.92 ; 1506.88,1152.43 ccw(c1511.51,1154.33) 1507.97,1150.79 1507.99,1150.77 ; 1506.88,1152.43 1506.89,1152.41 ccw(c1511.51,1154.33) 1507.99,1150.77 ; 1506.88,2677.57 cw(c1511.51,2675.67) 1507.97,2679.21 1507.99,2679.23 ; 1506.88,2677.57 1506.89,2677.59 cw(c1511.51,2675.67) 1507.99,2679.23 ; 1507.99,1150.77 1510.77,1147.99 ; 1507.99,2679.23 1510.77,2682.01 ; 1510.77,1147.99 ccw(c1514.33,1151.51) 1512.41,1146.89 1512.43,1146.88 ; 1510.77,1147.99 1510.79,1147.97 ccw(c1514.33,1151.51) 1512.43,1146.88 ; 1510.77,2682.01 cw(c1514.33,2678.49) 1512.41,2683.11 ; 1510.77,2682.01 1510.79,2682.03 cw(c1514.33,2678.49) 1512.41,2683.11 ; 1512.41,2683.11 1516.09,2684.64 ; 1512.43,1146.88 1516.08,1145.37 ; 1516.09,1145.36 ccw(c1518.01,1149.98) 1518.01,1144.98 ; 1516.08,1145.37 ccw(c1518.01,1149.98) 1518.01,1144.98 ; 1516.08,1145.37 1516.09,1145.36 ; 1516.09,2684.64 cw(c1518.01,2680.02) 1518.01,2685.02 ; 1516.09,2684.64 cw(c1518.01,2680.02) 1518.01,2685.02 ; 1518.01,1144.98 1540,1144.98 4030.61,1144.98 ; 1518.01,2685.02 4030.61,2685.02 ; 4030.61,1144.98 ccw(c4030.61,1149.98) 4035.62,1149.98 ; 4030.61,1144.98 ccw(c4030.61,1149.98) 4035.62,1149.98 ; 4030.61,2685.02 cw(c4030.61,2680.02) 4035.62,2680.02 ; 4030.61,2685.02 cw(c4030.61,2680.02) 4035.62,2680.02 ; 4035.62,1149.98 4035.62,1410 4035.62,1414.53 4037.96,1423.27 4042.49,1431.11 4048.89,1437.51 4056.73,1442.04 4065.47,1444.38 4074.53,1444.38 4083.27,1442.04 4091.11,1437.51 4097.51,1431.11 4102.04,1423.27 4104.38,1414.53 4104.38,1410 4104.38,1149.98 ; 4035.62,2680.02 4035.62,2440 4035.62,2435.47 4037.96,2426.73 4042.49,2418.89 4048.89,2412.49 4056.73,2407.96 4065.47,2405.62 4074.53,2405.62 4083.27,2407.96 4091.11,2412.49 4097.51,2418.89 4102.04,2426.73 4104.38,2435.47 4104.38,2440 4104.38,2680.02 ; 4104.38,1149.98 ccw(c4109.39,1149.98) 4109.39,1144.98 ; 4104.38,1149.98 ccw(c4109.39,1149.98) 4109.39,1144.98 ; 4104.38,2680.02 cw(c4109.39,2680.02) 4109.39,2685.02 ; 4104.38,2680.02 cw(c4109.39,2680.02) 4109.39,2685.02 ; 4109.39,1144.98 5550,1144.98 5551.99,1144.98 ; 4109.39,2685.02 5551.99,2685.02 ; 5551.99,1144.98 ccw(c5551.99,1149.98) 5553.92,1145.37 ; 5551.99,1144.98 ccw(c5551.99,1149.98) 5553.91,1145.36 ; 5551.99,2685.02 cw(c5551.99,2680.02) 5553.91,2684.64 ; 5551.99,2685.02 cw(c5551.99,2680.02) 5553.91,2684.64 ; 5553.92,1145.37 5557.57,1146.88 ; 5553.91,1145.36 5553.92,1145.37 ; 5553.91,2684.64 5557.59,2683.11 ; 5557.57,1146.88 ccw(c5555.67,1151.51) 5559.21,1147.97 5559.23,1147.99 ; 5557.57,1146.88 5557.59,1146.89 ccw(c5555.67,1151.51) 5559.23,1147.99 ; 5557.59,2683.11 cw(c5555.67,2678.49) 5559.23,2682.01 ; 5557.59,2683.11 cw(c5555.67,2678.49) 5559.21,2682.03 5559.23,2682.01 ; 5559.23,1147.99 5562.01,1150.77 ; 5559.23,2682.01 5562.01,2679.23 ; 5562.01,1150.77 ccw(c5558.49,1154.33) 5563.11,1152.41 ; 5562.01,1150.77 5562.03,1150.79 ccw(c5558.49,1154.33) 5563.11,1152.41 ; 5562.01,2679.23 cw(c5558.49,2675.67) 5563.11,2677.59 5563.12,2677.57 ; 5562.01,2679.23 5562.03,2679.21 cw(c5558.49,2675.67) 5563.12,2677.57 ; 5563.11,1152.41 5564.64,1156.09 ; 5563.12,2677.57 5564.63,2673.92 ; 5564.64,1156.09 ccw(c5560.02,1158.01) 5565.02,1158.01 ; 5564.64,1156.09 ccw(c5560.02,1158.01) 5565.02,1158.01 ; 5564.64,2673.91 cw(c5560.02,2671.99) 5565.02,2671.99 ; 5564.63,2673.92 cw(c5560.02,2671.99) 5565.02,2671.99 ; 5564.63,2673.92 5564.64,2673.91 ; 5565.02,1158.01 5565.02,1160 5565.02,2670 ; 5565.02,2670 ccw(c5560.02,2670) 5565.02,2670 ; 5565.02,2670 ccw(c5560.02,2670) 5565.02,2670 ; 5565.02,2670 5565.02,2671.99 ; 5565.02,2671.99 ccw(c5560.02,2671.99) 5565.02,2671.99 ; 4035.62,1625.47 4035.62,1630 4035.62,2230 4035.62,2234.53 4037.96,2243.27 4042.49,2251.11 4048.89,2257.51 4056.73,2262.04 4065.47,2264.38 4074.53,2264.38 4083.27,2262.04 4091.11,2257.51 4097.51,2251.11 4102.04,2243.27 4104.38,2234.53 4104.38,2230 4104.38,1630 4104.38,1625.47 4102.04,1616.73 4097.51,1608.89 4091.11,1602.49 4083.27,1597.96 4074.53,1595.62 4065.47,1595.62 4056.73,1597.96 4048.89,1602.49 4042.49,1608.89 4037.96,1616.73 4035.62,1625.47
Route Tool Path:
  drawing of 241 lines, arcs and shapes, not listed